# Altium PCB ledy3.PcbDoc
Units mil, origin at the board's own origin, x right, y up, seen from the top; angles counter-clockwise.
Board outline 6000 x 4000 mil, 2 copper layers (Top Layer, Bottom Layer); 5 components, 0 nets, 7 pads, 0 vias.
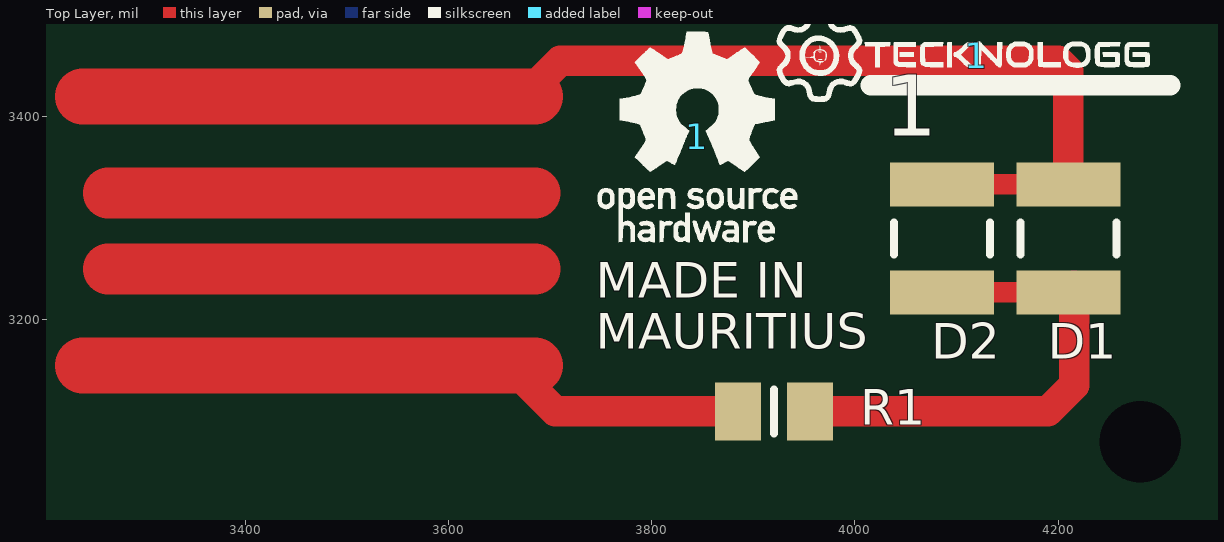
[diagram p0: Top Layer view]
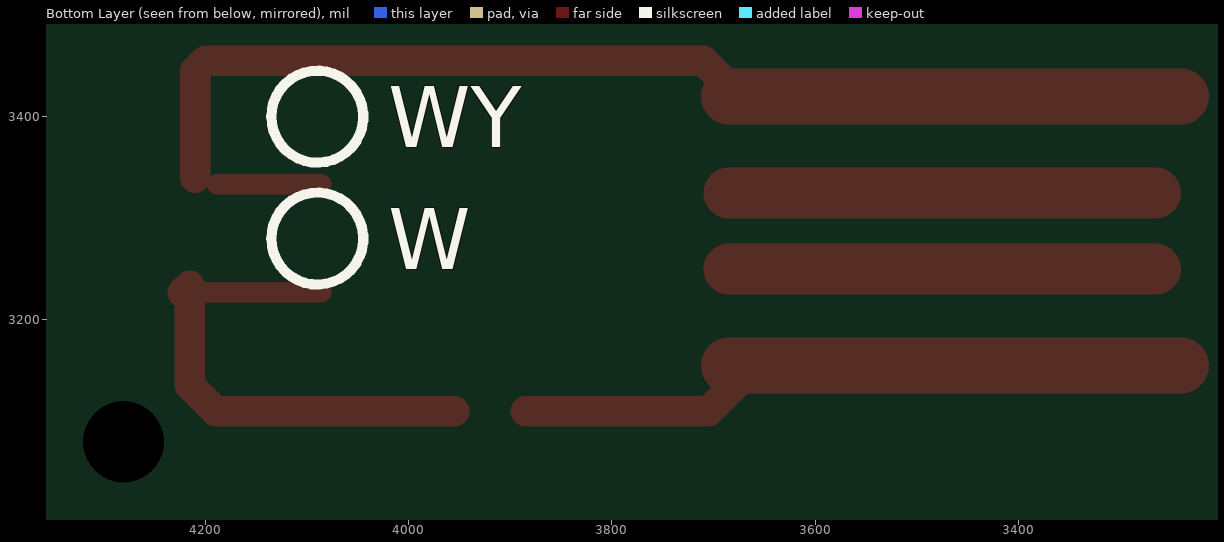
[diagram p1: Bottom Layer view, seen from below]

## Layer stack, top to bottom
Top Solder: solder mask 0.4, Solder Resist, Dk 3.5
Top Layer: signal copper 1.4
Dielectric 1: dielectric 12.6, FR-4, Dk 4.8
Bottom Layer: signal copper 1.4
Bottom Solder: solder mask 0.4, Solder Resist, Dk 3.5

## Board outline
1000,1000 7000,1000 7000,5000 1000,5000

## Design rules (kind name [scope] priority, off if disabled: settings)
Clearance [All] p1: gap=10 ignorepadtopadclearanceinfootprint=FALSE except(0: Arc-Hole Track-Hole SMDPad-Hole THPad-Hole Via-Hole Fill-Hole Poly-Hole Region-Hole Text-Hole)
PolygonConnect [All] p1: connectstyle=Relief reliefconductorwidth=10 reliefentries=4 polygonreliefangle="90 Angle" airgapwidth=10
RoutingVias [All] p1: holewidth=28 width=50 viastyle="Through Hole" minholewidth=28 minwidth=50 maxholewidth=28 maxwidth=50
SolderMaskExpansion [All] p1: expansion=4
Width [All] p1: maxlimit=10 minlimit=10 preferedwidth=10
30 further rules are at their usual default settings.

## Components (designator, comment, footprint, x,y, rotation, side; value= is the part's Value field where it differs from the comment)
1 "Comment" C1210 4085.9,3280.22 r270 top
1 "" IMAGE 3845,3380 r0 top
1 "" IMAGE 4120,3460 r0 top
? "Comment" C1210 4210,3280 r270 top
? "Comment" CAPC2012X140N 3920.43,3110 r0 top

## Footprints (in the part's own frame and the unit in brackets; to place one, negate y for a bottom-side part, rotate by r counter-clockwise, add the part's x,y. Pads: shape width x height; smd on the part's side, far side on the other; paste and mask are expansions set on the pad)
C1210 [mm] "Chip Capacitor, Body 3.2x2.5mm, IPC High Density"
  rect 1.1x2.6 smd: 1(-1.35,0) 2(1.35,0)
  silkscreen extent -0.4,-1.2 0.4,1.2, body extent -1.7,-1.35 1.7,1.35, height 1.3
CAPC2012X140N [mm]
  rect 1.15x1.45 smd: 1(-0.9,0) 2(0.9,0)
  silkscreen extent 0,-0.55 0,0.55
IMAGE [mil]
  silkscreen extent -98,-103 98,104

## Free pads (board coordinates)
  round 60 hole 80: 10(4280.83,3080)

## Nets (pads, with @x,y where several pads share a name; then routed paths per layer and width w, separated by ;. In a path a pad name is that pad's centre, name@x,y a point inside that pad or via, vN(x,y) a via of type N, cw(c..) or ccw(c..) an arc to the next point about the centre after c; other vN are vias at no path point)
pads on no net: 1.1 1.2 ?.1 ?.2
copper on no net: | length 3189
  Top Layer w20: 4085.9,3227.07 4200,3227.07 ; 4085.9,3333.37 4188.37,3333.37
  Top Layer w30: 3677.5,3137.5 3705,3110 3825,3110 3860,3110 3885,3110 ; 3685,3430 3710,3455 4165,3455 4200,3455 4210,3445 4210,3340 ; 3955,3110 4050.87,3110 4155,3110 4190,3110 4215.65,3135.65 4215.65,3233.7 4222.5,3226.85
  Top Layer w50: 3265,3250 3685,3250 ; 3265,3325 3685,3325
  Top Layer w55: 3240,3155 3685,3155 ; 3240,3420 3685,3420

## Silkscreen, mask and mechanical layers (free items; w line width, h text height)
Top Overlay:
  lines w20: 4015.58,3430.94 4310.21,3430.94
  text "MADE IN" at 3745,3210 h60
  text "MAURITIUS" at 3745,3160 h60
  text "D2" at 4075,3150 h60
  text "D1" at 4190,3150 h60
  text "R1" at 4005,3085 h60
Bottom Overlay:
  circle w10: c4090,3400 r45.28
  circle w10: c4090,3280 r45.28
  text "WY" at 4020,3370 h60
  text "W" at 4020,3250 h60
Top Solder:
  lines w50: 3265,3250 3685,3250 ; 3265,3325 3685,3325
  lines w55: 3240,3155 3685,3155 ; 3240,3420 3685,3420
Mechanical 1:
  lines w10: 3190,3065 3630,3065 3750,3065 3785,3030 4330,3030 4330,3545 3785,3545 3750,3510 3665,3510 3190,3510 3190,3065